# Altium PCB DE-150824.PcbDoc (part 1 of 2)
Units mil, origin at the board's own origin, x right, y up, seen from the top; angles counter-clockwise.
Board outline 2952.76 x 2952.76 mil, 2 copper layers (Top Layer, Bottom Layer); 84 components, 58 nets, 253 pads, 61 vias.
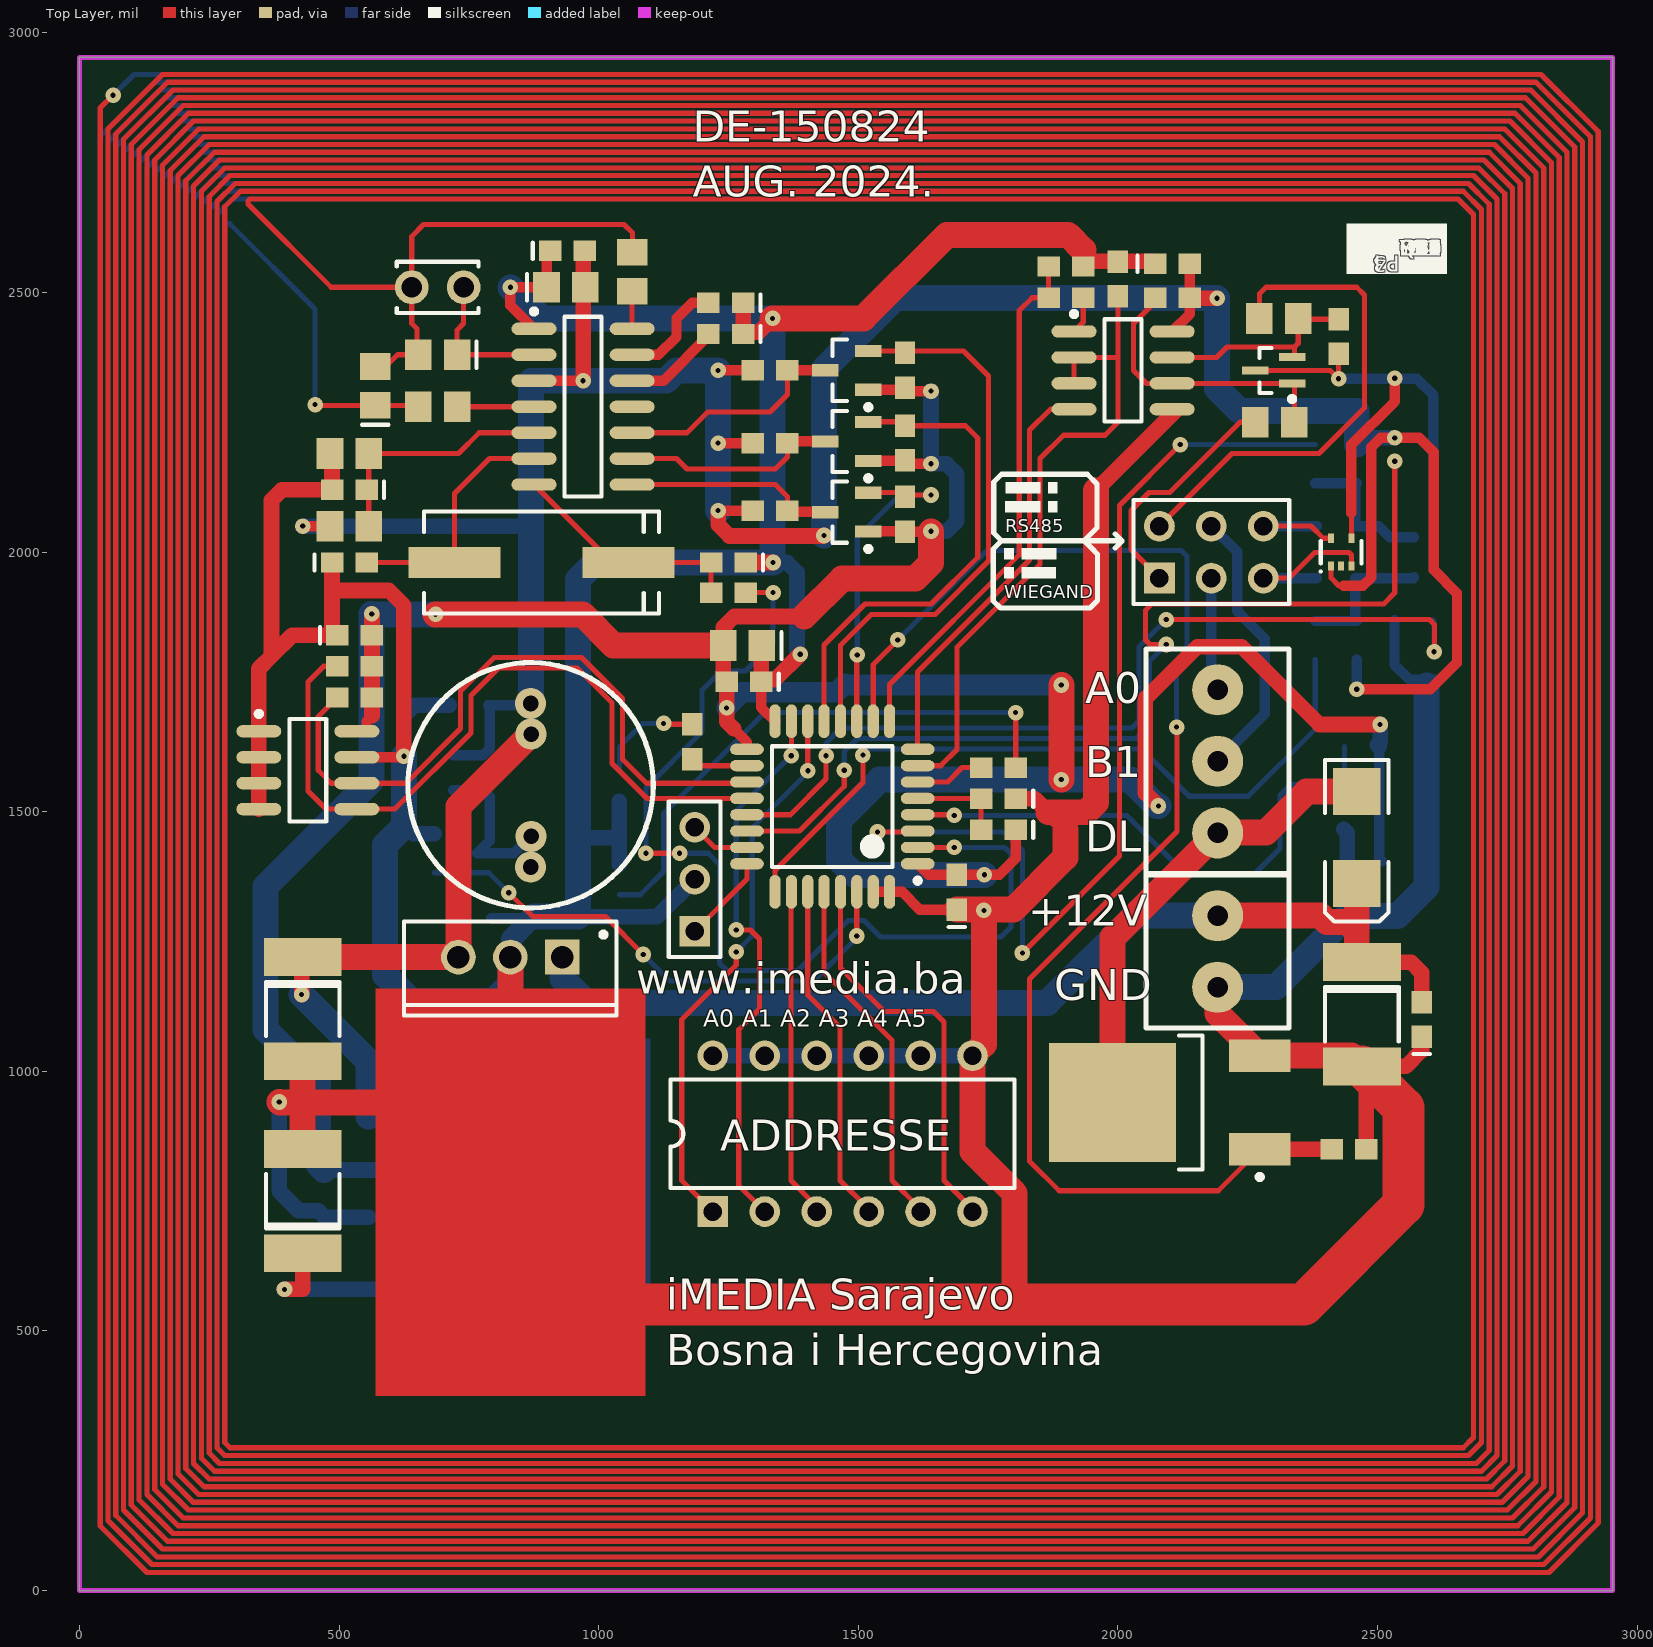
[diagram p0: Top Layer view]
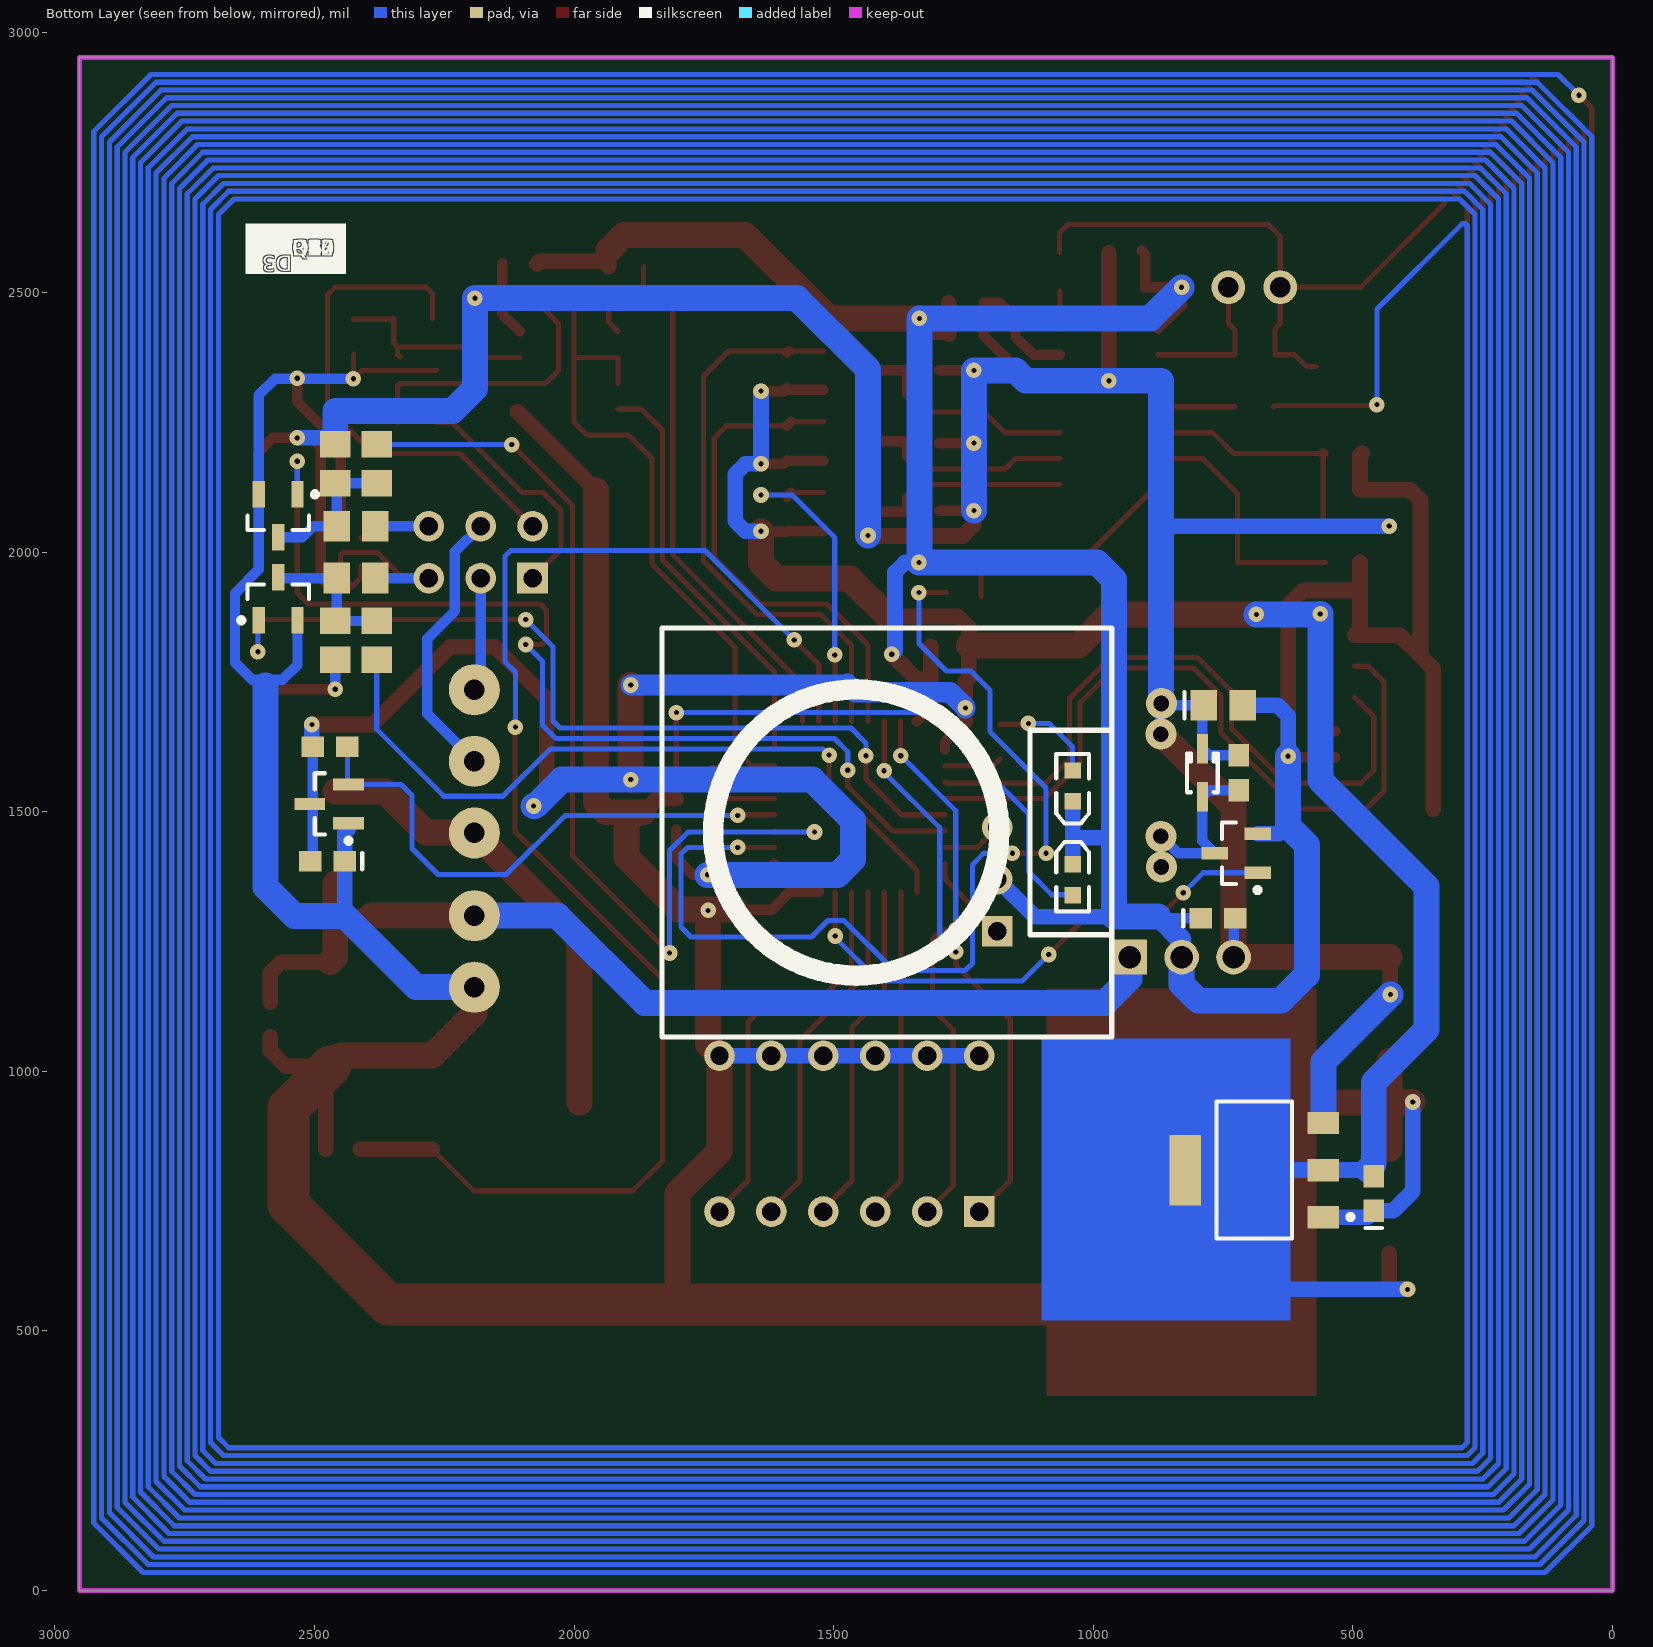
[diagram p1: Bottom Layer view, seen from below]

## Layer stack, top to bottom
Top Solder: solder mask 0.4, Solder Resist, Dk 3.5
Top Layer: signal copper 1.4
Dielectric 1: dielectric 12.6, FR-4, Dk 4.8
Bottom Layer: signal copper 1.4
Bottom Solder: solder mask 0.4, Solder Resist, Dk 3.5

## Board outline
0,0 0,2952.76 2952.76,2952.76 2952.76,0

## Design rules (kind name [scope] priority, off if disabled: settings)
BoardOutlineClearance [All] p1: gap=11.81 ignorepadtopadclearanceinfootprint=FALSE except(15.75: Arc-SplitBarrior Arc-SplitContinuation Track-SplitBarrior Track-SplitContinuation SMDPad-SplitBarrior SMDPad-SplitContinuation THPad-SplitBarrior THPad-SplitContinuation Via-SplitBarrior Via-SplitContinuation Fill-SplitBarrior Fill-SplitContinuation Poly-SplitBarrior Poly-SplitContinuation Region-SplitBarrior Region-SplitContinuation Text-SplitBarrior Text-SplitContinuation)
Clearance "Clearance Different Nets" [All] p1: gap=7.87 ignorepadtopadclearanceinfootprint=FALSE except(3.5: Arc-Arc Arc-Track Arc-SMDPad Track-Track Track-SMDPad; 5: SMDPad-SMDPad SMDPad-Via THPad-Via Via-Via; 10: Arc-Via Arc-Text Track-Via Track-Text SMDPad-Text THPad-Text Via-Text Fill-Text Poly-Text Region-Text Text-Text; 19.68: THPad-THPad Via-Hole)
Clearance "Clearance Same Nets" [All] p2: gap=7.87 ignorepadtopadclearanceinfootprint=FALSE except(3.5: Arc-Arc Arc-Track Arc-SMDPad Track-Track Track-SMDPad SMDPad-SMDPad; 5: SMDPad-Via THPad-Via; 10: Arc-Via Arc-Text Track-Via Track-Text SMDPad-Text THPad-Text Via-Via Via-Text Fill-Text Poly-Text Region-Text Text-Text)
Clearance "Clearance Bottom Layer" [OnLayer('Bottom Layer')] p3: gap=8 ignorepadtopadclearanceinfootprint=TRUE except(10: Arc-Text Track-Text SMDPad-Text THPad-Text Via-Text Fill-Text Poly-Text Region-Text Text-Text)
Clearance "Clearance Top Layer" [OnLayer('Top Layer')] p4: gap=8 ignorepadtopadclearanceinfootprint=TRUE except(10: Arc-Text Track-Text SMDPad-Text THPad-Text Via-Text Fill-Text Poly-Text Region-Text Text-Text)
HoleSize [All] p1: absolutevalues=TRUE maxlimit=248.03 minlimit=7.87 maxpercent=80.000 minpercent=20.000
MinimumAnnularRing [All] p1: minimumring=5.12
MinimumSolderMaskSliver [All] p1: minsoldermaskwidth=3.94
PolygonConnect PolygonConnect_1 [All] p1: thpad.connectstyle=Relief thpad.reliefconductorwidth=20 thpad.reliefentries=4 thpad.polygonreliefangle="90 Angle" thpad.airgapwidth=10 smdpad.connectstyle=Relief smdpad.reliefconductorwidth=20 smdpad.reliefentries=4 smdpad.polygonreliefangle="90 Angle" smdpad.airgapwidth=10 via.connectstyle=Direct via.reliefconductorwidth=20 via.reliefentries=4 via.polygonreliefangle="90 Angle" via.airgapwidth=10
RoutingCorners [All] p1: cornerstyle=Round minsetback=100 maxsetback=100
RoutingVias [All] p1: holewidth=19.68 width=39.37 viastyle="Through Hole" minholewidth=7.87 minwidth=13.78 maxholewidth=39.37 maxwidth=78.74
SilkToSilkClearance [All] p1: silktosilkclearance=3.94
SilkToSolderMaskClearance [IsPad] p1: minsilkscreentomaskgap=3.94 clearancetoexposedcopper=TRUE
SolderMaskExpansion [All] p1: expansion=4 istentingtop=FALSE
Width [All] p1: maxlimit=100 minlimit=3.5 preferedwidth=15
25 further rules are at their usual default settings.

## Components (designator, comment, footprint, x,y, rotation, side; value= is the part's Value field where it differs from the comment)
C1 "C0603" 0603 940,2580 r0 top value=100nF
C2 "C0805" 0805 937,2510 r0 top value=10uF
C3 "1nF" VP31-2.5 690,2510 r0 top value=1pF
C4 "C0805" 0805 690,2380 r180 top value=1nF
C5 "C0603" 0603 1245,2480 r180 top value=100nF
C6 "C0603" 0603 1245,2420 r180 top value=100nF
C7 "C0805" 0805 570,2320 r90 top value=1nF
C8 "20pF" 0603 520,1980 r0 top
C9 "20pF" 0603 1250,1980 r180 top
C10 "C0603" 0603 520,2120 r180 top value=1nF
C11 "C0603" 0603 1690,1345 r90 top value=100nF
C12 "C0603" 0603 530,1840 r0 top value=100nF
C13 "C0805" 0805 750,1705 r180 bottom value=4u7
C14 "C0603" 0603 2105,2555 r0 top value=100nF
C15 "C0805" 0805 1277,1820 r180 top value=4u7
C16 "C0603" 0603 1280,1750 r180 top value=100nF
C17 "C0603" 0603 2475,1405 r0 bottom value=100nF
C18 "C0603" 0603 1770,1525 r180 top value=100nF
C19 "100uF/35V" F 2470,1110 r270 top value=10uF
C20 "100uF/35V" F 430,1120 r270 top value=10uF
C21 "100uF/35V" F 430,750 r90 top value=10uF
C22 "C0603" 0603 2585,1100 r90 top value=100nF
C23 "C0603" 0603 760,1295 r180 bottom value=100nF
C24 "C0603" 0603 460,765 r90 bottom value=100nF
D1 "10BQ100" SMB 2460,1450 r270 top
D2 "1N4148" SOD323 790,1575 r90 bottom
D3 "LED_RED" 1.6X0.8X0.8 1040,1369 r90 bottom
D4 "LED_GREEN" 1.6X0.8X0.8 1040,1550 r270 bottom locked
L1 "BLM15AG121" 0603 1770,1465 r180 top
LS1 "Buzzer 5Vdc" BUZZER 869,1551 r270 top locked
P1 "ULINK ICSP" HDR1X3 1185,1270 r90 top
P2 "Header 3X2" HDR2X3 2080,1950 r0 top
P3 "3 pin terminal" "3 PIN TERMINAL BLOCK  3,5mm" 2192,1597 r180 top locked
P4 "2 pin terminal" "2 PIN TERMINAL BLOCK 3,5mm" 2192,1231 r180 top locked
PS1 "PIEEZP" PKM13EPYH4000-A0 870,1551 r90 top locked
Q1 "AO3400" SOT23_N 2570,1910 r90 bottom
Q2 "BSS123" SOT23_N 1478,2077 r180 top
Q3 "AO3400" SOT23_N 2570,2070 r270 bottom
Q4 "BSS123" SOT23_N 1478,2213 r180 top
Q5 "BSS123" SOT23_N 1478,2350 r180 top
Q6 "BSS123" SOT23_N 725,1420 r0 bottom
R1 "2K2" ERA-0805 2460,1830 r270 bottom
R2 "100R" ERA-0805 2420,1950 r180 bottom
R3 "10K" ERA-0805 2380,1830 r90 bottom
R4 "220K" ERA-0805 1065,2540 r90 top
R5 "2K2" ERA-0603 1590,2073 r270 top
R6 "2K2" ERA-0603 1330,2080 r180 top
R7 "22R" ERA-0805 690,2280 r0 top
R8 "2K2" ERA-0805 2460,2170 r90 bottom
R9 "100R" ERA-0805 2420,2050 r180 bottom
R10 "10K" ERA-0805 2380,2170 r270 bottom
R11 "2K2" ERA-0603 1590,2210 r270 top
R12 "2K2" ERA-0603 1330,2210 r180 top
R13 "NF" ERA-0603 1250,1922 r0 top
R14 "NF" ERA-0805 520,2050 r180 top
R15 "1M" ERA-0805 520,2190 r0 top
R16 "2K2" ERA-0603 1590,2350 r270 top
R17 "2K2" ERA-0603 1330,2350 r180 top
R18 "10K" ERA-0603 2470,1625 r180 bottom
R19 "2K2" ERA-0603 530,1720 r0 top
R20 "2K2" ERA-0603 530,1780 r0 top
R21 "10K" ERA-0603 2445,850 r0 top
R22 "1K" ERA-0603 720,1575 r270 bottom
R23 "10K" ERA-0603 2000,2526 r90 top
R24 "10R" ERA-0805 2302,2250 r0 top
R25 "10R" ERA-0805 2310,2450 r0 top
R26 "1K2" ERA-0603 1900,2490 r180 top
R27 "2K2" ERA-0603 1900,2550 r180 top
R28 "330R" ERA-0603 1770,1585 r0 top
R29 "4K7" ERA-0603 2105,2490 r180 top
R30 "4K7" ERA-0603 2425,2415 r90 top
R31 "330R" ERA-0603 1180,1635 r90 top
S1 "SW DIP-6" DIP-12/SW 1470,880 r0 top
U1 "HTRC110" SOIC-SL14_N 970,2280 r0 top
U2 "TPD2E001-Q1" DRL5_V 2430,2000 r90 top
U3 "STM32F030K6T6" STM-LQFP32_N 1450,1510 r180 top
U4 "24AA64/SN" SOIC-SN8_N 440,1580 r0 top
U5 "IRLR014TRLPBF" ONSC-DPAK-3-369C-01_V 2100,940 r180 top
U6 "TLV803MDBZR" DBZ3_N 2472,1515 r0 bottom
U7 "SN75176BD" D008_N 2010,2350 r0 top
U8 "ESDS552" DCK3_N 2300,2350 r180 top
U9 "L7805CV" TO220 830,1220 r180 top
U10 "REG1117-3.3" ZZ311 690,810 r90 bottom
Y1 "ECS-110-S-5P" CSM-7 890,1980 r180 top value=4MHz

## Footprints (in the part's own frame and the unit in brackets; to place one, negate y for a bottom-side part, rotate by r counter-clockwise, add the part's x,y. Pads: shape width x height; smd on the part's side, far side on the other; paste and mask are expansions set on the pad)
1.6X0.8X0.8 [mm] "SM LED; 2 Flat Leads"
  rect 0.8x0.8 smd: 1(-0.75,0) 2(0.75,0)
  silkscreen extent -1.55,-0.8 1.85,0.8
"2 PIN TERMINAL BLOCK 3,5mm" [mm] "Terminal blok 3,5mm"
  round 2.5 hole 1: 1(0,-1.75) 2(0,1.75)
  silkscreen extent -3.5,-3.75 3.5,3.75, body extent -3.56,-3.81 3.56,3.81, height 9
"3 PIN TERMINAL BLOCK  3,5mm" [mm] "Terminal blok 3,5mm"
  round 2.5 hole 1: 1(0,3.5) 2(0,0) 3(0,-3.5)
  silkscreen extent -3.5,-5.5 3.5,5.5, body extent -3.56,-5.59 3.56,5.59, height 9
0603 [mm] "Chip Capacitor; Body 1.6 x 0.8 mm (LxW typ)"
  rect 1.1x1 smd: 1(-0.85,0) 2(0.85,0)
  silkscreen extent -1.7,-0.4 -1.7,0.4
0805 [mm] "Chip Capacitor; Body 2.0 x 1.2 mm (LxW typ)"
  rect 1.3x1.5 smd: 1(-0.95,0) 2(0.95,0)
  silkscreen extent -1.9,-0.65 -1.9,0.65
BUZZER [mil] "5Vdc PCB buzzer"
  round 60 hole 30: 1(-157.48,0) 2(157.48,0)
  silkscreen extent -236,-236 236,236, body extent -236,-236 236,236, height 378
CSM-7 [mm] "Quartz Crystal, SM; 2 Leads; Body 11.4 x 4.8 x 5 mm (LxWxH)"
  rect 4.5x1.5 smd: 1(-4.25,0) 2(4.25,0)
  silkscreen extent -5.75,-2.5 5.75,2.5
D008_N [mm] "SOIC, 8-Leads, Body 4.9x3.9mm, Pitch 1.27mm, IPC Medium Density"
  oval 2.2x0.6 smd: 1(-2.4,1.905) 2(-2.4,0.635) 3(-2.4,-0.635) 4(-2.4,-1.905) 5(2.4,-1.905) 6(2.4,-0.635) 7(2.4,0.635) 8(2.4,1.905)
  silkscreen extent -2.52,-2.5 0.9,2.88, body extent -1.95,-2.45 1.95,2.45, height 1.75
DBZ3_N [mm] "SOT23, 3-Leads, Body 2.9x1.3mm, Pitch 0.95mm, Lead Span 2.4mm, IPC Medium Density"
  rect 1.5x0.6 smd: 1(-0.95,0.95) 2(-0.95,-0.95) 3(0.95,0)
  silkscreen extent -1.07,-1.5 0.7,1.92, body extent -0.7,-1.52 0.7,1.52, height 1.12
DCK3_N [mm] "SOT23, 3-Leads, Body 2.0x1.25mm, Pitch 0.65mm, Lead Span 2.1mm, IPC Medium Density"
  rect 1.3x0.4 smd: 1(-0.9,0.65) 2(-0.9,-0.65) 3(0.9,0)
  silkscreen extent -1.02,-1.1 0.7,1.52, body extent -0.7,-1.07 0.7,1.08, height 1.1
DIP-12/SW [mm] "DIP Switch; 12 Leads"
  rect 1.5x1.5 hole 0.9: 1(-6.35,-3.81)
  round 1.5 hole 0.9: 2(-3.81,-3.81) 3(-1.27,-3.81) 4(1.27,-3.81) 5(3.81,-3.81) 6(6.35,-3.81) 7(6.35,3.81) 8(3.81,3.81) 9(1.27,3.81) 10(-1.27,3.81) 11(-3.81,3.81) 12(-6.35,3.81)
  silkscreen extent -8.43,-2.65 8.41,2.65
DRL5_V [mm] "SOTFL, 5-Flat Leads, Body 1.2x1.6x0.6mm, Pitch 0.5mm, TI Recommended"
  rect 0.45x0.3 smd: 1(-0.675,0.5) 2(-0.675,0) 3(-0.675,-0.5) 4(0.675,-0.5) 5(0.675,0.5)
  silkscreen extent -1,-1 0.55,1.05, body extent -0.65,-0.85 0.65,0.85, height 0.6
ERA-0603 [mm] "Chip Resistor; Body 1.6 x 0.8 mm (LxW typ)"
  rect 1.1x1 smd: 1(-0.85,0) 2(0.85,0)
ERA-0805 [mm] "Chip Resistor; Body 2 x 1.3 mm (LxW typ)"
  rect 1.3x1.5 smd: 1(-0.95,0) 2(0.95,0)
F [mm] "Chip Capacitor; Body 5.59 x 3.43 mm (LxW typ)"
  rect 1.85x3.8 smd: 1(-2.55,0) 2(2.55,0)
  silkscreen extent -1.33,-1.8 1.33,1.8
HDR1X3 [mm] "Connector; Header; 3 Position"
  rect 1.5x1.5 hole 0.9: 1(0,0)
  round 1.5 hole 0.9: 2(2.54,0) 3(5.08,0)
  silkscreen extent -1.27,-1.27 6.35,1.27
HDR2X3 [mm] "Connector; Header; 3x2 Position"
  rect 1.5x1.5 hole 0.9: 1(0,0)
  round 1.5 hole 0.9: 2(0,2.54) 3(2.54,0) 4(2.54,2.54) 5(5.08,0) 6(5.08,2.54)
  silkscreen extent -1.27,-1.27 6.35,3.81
ONSC-DPAK-3-369C-01_V [mm] "DPAK, 3-Leads, Body 6.54x6.095mm, Pitch 2.29mm"
  rect 3x1.6 smd: 1(-4.4,2.29) 3(-4.4,-2.29)
  rect 6.2x5.8 smd: 4(2.8,0)
  silkscreen extent -4.53,-3.27 -0.45,3.76, body extent -1.6,-3.27 4.49,3.27, height 2.38
PKM13EPYH4000-A0 [mil] "standard taping type piezoelectric sounders"
  round 60 hole 30: 1(-98.43,0) 2(98.43,0)
  body extent -248,-248 248,248, height 272
SMB [mm] "DO-214-AA/SMB; 2 C-Bend Leads; Body 5.3 x 3.6 mm, inc. leads (LxW)"
  rect 2.3x2.3 smd: 1(-2.25,0) 2(2.25,0)
  silkscreen extent -3.8,-1.55 4.1,1.55
SOD323 [mm] "SOD-323/SC-76; 2 Leads; Body 1.7 x 1.3 mm, (LxW)"
  rect 1.45x0.55 smd: 1(1.175,0) 2(-1.175,0)
  silkscreen extent -0.95,-0.75 0.95,0.75
SOIC-SL14_N [mm] "SOIC, 14-Leads, Body 8.7x3.9mm, Pitch 1.27mm, IPC Medium Density"
  oval 2.2x0.6 smd: 1(-2.4,3.81) 2(-2.4,2.54) 3(-2.4,1.27) 4(-2.4,0) 5(-2.4,-1.27) 6(-2.4,-2.54) 7(-2.4,-3.81) 8(2.4,-3.81) 9(2.4,-2.54) 10(2.4,-1.27) 11(2.4,0) 12(2.4,1.27) 13(2.4,2.54) 14(2.4,3.81)
  silkscreen extent -2.52,-4.4 0.9,4.78, body extent -2,-4.38 2,4.38, height 1.75
SOIC-SN8_N [mm] "SOIC, 8-Leads, Body 4.9x3.8mm, Pitch 1.27mm, IPC Medium Density"
  oval 2.2x0.6 smd: 1(-2.4,1.905) 2(-2.4,0.635) 3(-2.4,-0.635) 4(-2.4,-1.905) 5(2.4,-1.905) 6(2.4,-0.635) 7(2.4,0.635) 8(2.4,1.905)
  silkscreen extent -2.52,-2.5 0.9,2.88, body extent -2,-2.5 2,2.5, height 1.75
SOT23_N [mm] "SOT23, 3-Leads, Body 2.9x1.3mm, Pitch 0.95mm, Lead Span 2.3mm, IPC Medium Density"
  rect 1.3x0.6 smd: 1(-1.05,0.95) 2(-1.05,-0.95) 3(1.05,0)
  silkscreen extent -1.17,-1.5 0.7,1.93, body extent -0.7,-1.5 0.7,1.5, height 1.1
STM-LQFP32_N [mm] "QFP, 32-Leads, Body 7x7mm, Pitch 0.8mm, IPC Medium Density"
  oval 1.65x0.55 smd: 1(-4.175,2.8) 2(-4.175,2) 3(-4.175,1.2) 4(-4.175,0.4) 5(-4.175,-0.4) 6(-4.175,-1.2) 7(-4.175,-2) 8(-4.175,-2.8) 17(4.175,-2.8) 18(4.175,-2) 19(4.175,-1.2) 20(4.175,-0.4) 21(4.175,0.4) 22(4.175,1.2) 23(4.175,2) 24(4.175,2.8)
  oval 0.55x1.65 smd: 9(-2.8,-4.175) 10(-2,-4.175) 11(-1.2,-4.175) 12(-0.4,-4.175) 13(0.4,-4.175) 14(1.2,-4.175) 15(2,-4.175) 16(2.8,-4.175) 25(2.8,4.175) 26(2,4.175) 27(1.2,4.175) 28(0.4,4.175) 29(-0.4,4.175) 30(-1.2,4.175) 31(-2,4.175) 32(-2.8,4.175)
  silkscreen extent -4.3,-2.95 2.95,3.75, body extent -3.5,-3.5 3.5,3.5, height 1.6
TO220 [mm] "TO, Thru-Hole, Vertical, Heatsink Mounted; 3 In-Line Leads; Pitch 2.54 mm"
  rect 1.7x1.7 hole 1.1: 1(-2.54,0)
  round 1.7 hole 1.1: 2(0,0) 3(2.54,0)
  silkscreen extent -5.2,-1.75 5.2,2.85, body extent -5.25,-1.8 5.25,2.9, height 19.7
VP31-2.5 [mm] "Capacitor, Ceramic, Thru-Hole, Dipped Radial; Body 4 x 2.5 mm (WxT) Pin Spacing 2.54 mm (typ)"
  round 1.65 hole 1: 1(-1.27,0) 2(1.27,0)
  silkscreen extent -2,-1.25 2,1.25
ZZ311 [mm] "SOT-223/SC-73; 4 Leads; Body 6.7 x 7.3 mm, inc. leads (LxW max)"
  rect 1.1x1.55 smd: 1(-2.3,-3.375) 2(0,-3.375) 3(2.3,-3.375)
  rect 3.45x1.55 smd: 4(0,3.375)
  silkscreen extent -3.35,-4.82 3.35,1.85

## Part data
C1 C2 C4 C5 C6 C7 C10 C11 C12 C13 C14 C15 C16 C17 C18 C22 C23 C24: "Ceramic Chip Capacitor - Standard", PackageDocument=Mar-2001, ComponentLink1Description="Manufacturer Link", ComponentLink1URL=http://www.kemet.com/, ComponentLink2Description=Datasheet, ComponentLink2URL=http://www.kemet.com/kemet/web/homepage/kechome.nsf/vapubfilesname/F3102TA.pdf/$file/F3102TA.pdf, DatasheetDocument=Mar-2001, LatestRevisionDate=19-Mar-2004, LatestRevisionNote="Silkscreen size reduced.", Note="Footprint corresponds to dimensions for bulk cassette packaging. This case size has tightened tolerances.", Published=17-Jul-2002, Publisher="Altium Limited"
  C1 C5 C6 C10 C11 C12 C14 C16 C17 C18 C22 C23 C24: Code_IPC="1608 [0603]", Code_JEITA=0603, PackageReference=0603
  C2 C4 C7 C13 C15: Code_IPC=2012[0805], Code_JEITA=0805, PackageReference=0805
C3: library part VP31BA1R0CA, "Dipped Radial Multilayer Ceramic Capacitor COG (NPO): 1pF, 50/63V", PackageDocument=8-Feb-2002, ComponentLink1Description="Manufacturer Link", ComponentLink1URL=http://www.vishay.com/, DatasheetDocument=2-Jan-2002, Note="See Datasheet for other packages & tolerances", PackageReference=VP31-2.5, Published=17-Dec-2003, Publisher="Altium Limited"
C8 C9: library part C0603, "Ceramic Chip Capacitor - Standard", PackageDocument=Mar-2001, Code_IPC="1608 [0603]", Code_JEITA=0603, ComponentLink1Description="Manufacturer Link", ComponentLink1URL=http://www.kemet.com/, ComponentLink2Description=Datasheet, ComponentLink2URL=http://www.kemet.com/kemet/web/homepage/kechome.nsf/vapubfilesname/F3102TA.pdf/$file/F3102TA.pdf, DatasheetDocument=Mar-2001, LatestRevisionDate=19-Mar-2004, LatestRevisionNote="Silkscreen size reduced.", Note="Footprint corresponds to dimensions for bulk cassette packaging. This case size has tightened tolerances.", PackageReference=0603, Published=17-Jul-2002, Publisher="Altium Limited"
C19 C20 C21: library part 194D106X0015F2, "Midget Conformal Coated Solid Tantalum Chip Capacitor: 10uF, 20% Tolerance, 15 WVDC @ +85°C, Surge = 20V", ComponentLink1Description="Manufacturer Link", ComponentLink1URL=http://www.vishay.com/, ComponentLink2Description=Datasheet, ComponentLink2URL=http://www.vishay.com/docs/40000/194d.pdf, DatasheetDocument=05-Jul-2002, Note="See Data Sheet for full range of components", PackageReference=F, Published=19-Mar-2004, Publisher="Altium Limited"
D1: "Schottky Rectifier", ComponentLink1Description="Manufacturer Link", ComponentLink1URL=http://www.irf.com/, ComponentLink2Description=Datasheet, ComponentLink2URL=http://www.irf.com/product-info/datasheets/data/10bq100.pdf, DatasheetVersion=PD-2.437A, LatestRevisionDate=17-Jul-2002, LatestRevisionNote="Re-released for DXP Platform.", PackageDescription="DO-214-AA/SMB; 2 C-Bend Leads; Body 5.3 x 3.6 mm, inc. leads (LxW)", PackageReference=SMB, Published=8-Jun-2000, Publisher="Altium Limited"
D2: library part BAS321, "General-purpose Diode", ComponentLink1Description="Manufacturer Link", ComponentLink1URL=http://www.semiconductors.philips.com/, ComponentLink2Description=Datasheet, ComponentLink2URL=http://www.semiconductors.philips.com/acrobat/datasheets/BAS321_2.pdf, DatasheetVersion=9-Feb-1999, LatestRevisionDate=19-Mar-2004, LatestRevisionNote="Silkscreen size reduced.", PackageDescription="SOD-323/SC-76; 2 Leads; Body 1.7 x 1.3 mm, (LxW)", PackageReference=SOD323, PackageVersion=May-1999, Published=17-Sep-2003, Publisher="Altium Limited"
D3 D4: library part HSMB-C190, "Blue Surface Mount Chip LED, Blue", LED_Colour=Blue, ComponentLink1Description="Manufacturer Link", ComponentLink1URL=http://www.avagotech.com/, ComponentLink2Description=Datasheet, ComponentLink2URL=http://cp.literature.agilent.com/litweb/pdf/5988-5211EN.pdf, DatasheetVersion=26-Feb-2002, LuminousIntensity="1.6mcd (Minimum).", PackageDescription="SM LED; 2 Flat Leads", PackageReference=1.6X0.8X0.8, PackageVersion=Mar-2002, PCB_Layout="Complies with manufacturer's recommendation.", Published=11-Dec-2002, Publisher="Altium Limited"
L1: library part "Chip inductor", "SMD chip inductor", Code_IEC=1005, Code_JEITA=0402, LatestRevisionDate=29-May-2009, LatestRevisionNote="IPC-7351 Footprint Added.", PackageDescription="Chip Inductor", PackageReference=0402-A, Published=8-Jun-2000, Publisher="Altium Limited"
LS1: library part BUZZER, "5Vdc PCB buzzer"
P1: library part "Header 3", "Header, 3-Pin", LatestRevisionDate=17-Jul-2002, LatestRevisionNote="Re-released for DXP Platform.", Publisher="Altium Limited"
P2: "Header, 3-Pin, Dual row", LatestRevisionDate=17-Jul-2002, LatestRevisionNote="Re-released for DXP Platform.", Publisher="Altium Limited"
P3: library part "TERMINAL BLOK 3", "3 pinski terminal blok konektor"
P4: library part "TERMINAL BLOK 2", "Terminal blok konektor 3,5 mm"
PS1: library part PKM13EPYH4000-A0, "Surface Mount Quartz Crystal", PackageDocument=18-Oct-1999, ComponentLink1Description="Manufacturer Link", ComponentLink1URL=http://www.cmac.com/mt/, ComponentLink2Description=Datasheet, ComponentLink2URL=http://www.cmac.com/mt/databook/crystals/smd/hc49_4h_smx.pdf, DatasheetDocument=18-Oct-1999, Note="PCB layout complies with manufacturer's recommendation.", PackageReference=HC49/4H_SMX, Published=17-Jul-2002, Publisher="Altium Limited"
Q1 Q3: library part BSS123, "N-channel Enhancement Mode Vertical D-MOSFET", ComponentLink1Description="Manufacturer Link", ComponentLink1URL=http://www.semiconductors.philips.com/, ComponentLink2Description=Datasheet, ComponentLink2URL=http://www.semiconductors.philips.com/acrobat/datasheets/BSS123_3.pdf, DatasheetVersion=Apr-1995, LatestRevisionDate=12-Dec-2006, LatestRevisionNote="IPC-7351 Footprint Added.", PackageDescription="3-Pin SOT-23 Package 0.95 mm Pitch, 2.3 mm Lead Span", PackageReference=SOT23, PackageVersion=May-1999, Published=17-Sep-2003, Publisher="Altium Limited"
Q2 Q4 Q5 Q6: "N-channel Enhancement Mode Vertical D-MOSFET", ComponentLink1Description="Manufacturer Link", ComponentLink1URL=http://www.semiconductors.philips.com/, ComponentLink2Description=Datasheet, ComponentLink2URL=http://www.semiconductors.philips.com/acrobat/datasheets/BSS123_3.pdf, DatasheetVersion=Apr-1995, LatestRevisionDate=12-Dec-2006, LatestRevisionNote="IPC-7351 Footprint Added.", PackageDescription="3-Pin SOT-23 Package 0.95 mm Pitch, 2.3 mm Lead Span", PackageReference=SOT23, PackageVersion=May-1999, Published=17-Sep-2003, Publisher="Altium Limited"
R1 R2 R3 R4 R7 R8 R9 R10 R13 R14 R15 R24 R25: library part ERAS, "Metal Film Thermosensitive Chip Resistor, 0.56 Ohm to 10k Ohm Range, 5% Tolerance, 0805 Size, 0.1 W", PackageDocument=Mar-2003, Code_IPC="2012 [0805]", ComponentLink1Description="Manufacturer Link", ComponentLink1URL=http://www.panasonic.com/industrial/components/resistive_products.htm, ComponentLink2Description=Datasheet, ComponentLink2URL=http://www.panasonic.com/industrial/components/pdf/AOF0000CE1.pdf, LatestRevisionDate=19-Mar-2004, LatestRevisionNote="Silkscreen size reduced.", Note="If flow soldering, adjust pad width of PCB Footprint to 0.7 - 0.8 times the width of the resistor.", PackageReference=ERA-0805, Published=17-Dec-2003, Publisher="Altium Limited"
R5 R6 R11 R12 R16 R17 R18 R19 R20 R21 R22 R23 R26 R27 R28 R29 R30 R31: library part ERAV, "Metal Film Thermosensitive Chip Resistor, 0.56 Ohm to 10k Ohm Range, 5% Tolerance, 0603 Size, 0.063 W", PackageDocument=Mar-2003, Code_IPC="1608 [0603]", ComponentLink1Description="Manufacturer Link", ComponentLink1URL=http://www.panasonic.com/industrial/components/resistive_products.htm, ComponentLink2Description=Datasheet, ComponentLink2URL=http://www.panasonic.com/industrial/components/pdf/AOF0000CE1.pdf, LatestRevisionDate=19-Mar-2004, LatestRevisionNote="Silkscreen size reduced.", Note="If flow soldering, adjust pad width of PCB Footprint to 0.7 - 0.8 times the width of the resistor.", PackageReference=ERA-0603, Published=17-Dec-2003, Publisher="Altium Limited"
S1: "DIP Switch, 6 Position, SPST", LatestRevisionDate=17-Jul-2002, LatestRevisionNote="Re-released for DXP Platform.", PackageDescription="DIP Switch; 12 Leads", PackageReference=DIP-12/SW, Published=24-Mar-1999, Publisher="Altium Limited"
U1: "HITAG reader chip"
U2: library part TPD2E001IDRLRQ1, "Automotive Catalog Low-Capacitance + / - 15 kV ESD-Protection Array for High-Speed Data Inter, 2 Channels, -40 to +85 degC, 5-pin SOT (DRL), Green (RoHS & no Sb/Br)", Breakdown Voltage(Min)(V)=11, IO Capacitance(Typ)(pF)=1.5, IO Leakage Current(nA)=1, Manufacturer="Texas Instruments", Supplier Part Number 1=296-29985-2-ND, ComponentLink1Description=Datasheet, ComponentLink1URL=http://www.ti.com/general/docs/lit/getliterature.tsp?genericPartNumber=TPD2E001-Q1&fileType=pdf, ComponentLink2Description="URL Link1", ComponentLink2URL=SamplesURL:http://www.ti.com/product/tpd2e001-q1#samples, DatasheetVersion=SLLS993, Eco-Plan="Green (RoHS & no Sb/Br)", IEC 61000-4-2 Air-Gap(+/- kV)=15, IEC 61000-4-2 Contact(+/- kV)=8, Mounting Technology="Surface Mount", PackageDescription="5-Pin Plastic Small Outline, Flat Lead 0.5 mm Pitch", PackageReference=DRL5, PackageVersion="revD, Aug-2007", PartNumber=TPD2E001IDRLRQ1, SubFamily="ESD Solution", Supplier 1=Digi-Key, Supplier 2=Digi-Key, Supplier 3=Digi-Key, Supplier 4=Newark, Supplier 5=Mouser, Supplier Part Number 2=296-29985-1-ND, Supplier Part Number 3=296-29985-6-ND, Supplier Part Number 4=55R7553, Supplier Part Number 5=595-TPD2E001IDRLRQ1, USB High Speed=TRUE
U3: "ARM Cortex-M0 32-bit MCU, 32 KB Flash, 4 KB Internal RAM, 26 I/Os, 32-pin LQFP, -40 to 85 degC, Tray", I/Os (High Current)=26, Operating Frequency(F) (Processor speed) (MHz)=48, Supplier Part Number 1=497-14046-ND, Supply Voltage(Vcc) min (V)=2.4, ComponentLink1Description="Manufacturer URL", ComponentLink1URL=http://www.st.com/web/en/home.html, ComponentLink2Description=Datasheet, ComponentLink2URL=http://www.st.com/st-web-ui/static/active/en/resource/technical/document/datasheet/DM00088500.pdf, ComponentLink3Description="Package Specification", ComponentLink3URL=http://www.st.com/st-web-ui/static/active/en/resource/technical/document/datasheet/DM00088500.pdf, Core="ARM Cortex-M0", DatasheetVersion="Rev. 1", FLASH Size (Prog) (kB)=32, Internal RAM Size (kB)=4, Mounting Technology="Surface Mount", PackageDescription="32-Pin Low Profile Quad Flat Package, 7 x 7 mm Body, 0.8 mm Pitch", PackageReference=LQFP32, PackageVersion="Rev. 1, 07/2013", Packing=Tray, PartNumber=STM32F030K6T6, Supplier 1=Digi-Key, Supplier 2=Newark, Supplier 3=Mouser, Supplier Part Number 2=19X6194, Supplier Part Number 3=511-STM32F030K6T6
U4: "64Kbit, 400kHz, 1.7V, I2C Serial EEPROM, 8-Pin SOIC 150mil, Commercial Temperature", Supplier Part Number 1=24AA64/SN-ND, Code_IPC=SOIC127P600-8, Code_JEDEC=MS-012, ComponentLink1Description=Datasheet, ComponentLink1URL=http://ww1.microchip.com/downloads/en/DeviceDoc/21189Q.pdf, ComponentLink2Description="Packaging Specification", ComponentLink2URL=http://www.microchip.com/stellent/groups/techpub_sg/documents/packagingspec/en012702.pdf, ComponentLink3Description="Microchip.com Home", ComponentLink3URL=http://www.microchip.com/, DatasheetVersion="revQ, Jun-2009", PackageDescription="8-Lead Plastic Small Outline (SN) - Narrow, 3.90mm Body [SOIC]", PackageReference=SOIC-SN8, PackageVersion="revBB, Aug-2009", Published=29-Jan-2009, Publisher="Altium Limited", Supplier 1=Digi-Key
U5: library part NCV8408DTRKG, "Self-Protected Low Side Driver with Temperature and Current Limit, 42 V, 10 A, Single N-Channel, 3-Pin DPAK, Pb-Free, Tape and Reel", Manufacturer="On Semiconductor", Supplier Part Number 1=60W1739, Channel Polarity="N Channel", ComponentLink1Description="Manufacturer URL", ComponentLink1URL=http://www.onsemi.com/, ComponentLink2Description=Datasheet, ComponentLink2URL=http://www.onsemi.com/pub_link/Collateral/NCV8408-D.PDF, ComponentLink3Description="Package Specification", ComponentLink3URL=http://www.onsemi.cn/pub_link/Collateral/369C.PDF, DatasheetVersion="Rev. 2", Mounting Technology="Surface Mount", PackageDescription="3-Pin Flange Mount, Body 6.54 x 6.095 mm, Pitch 2.29 mm", PackageReference=DPAK-3-369C-01, PackageVersion="Rev. E, 02/2014", Packing="Tape and Reel", PartNumber=NCV8408DTRKG, RoHS=Pb-Free, Supplier 1=Newark, Supplier 2=Mouser, Supplier Part Number 2=863-NCV8408DTRKG
U6: "Voltage Supervisor with Active-Low, Open Drain Reset, 1 Supply Monitored, -40 to 125 degC, 3-pin SOT-23 (DBZ), Green (RoHS & no Sb/Br)", Manufacturer="Texas Instruments", Rating=Catalog, Supplier Part Number 1=296-29194-2-ND, Threshold Voltage 1 (typ)(Typ)(V)=4.38, # of supplies monitored=1, Code_JEDEC=TO-236-AB, ComponentLink1Description=Datasheet, ComponentLink1URL=http://www.ti.com/general/docs/lit/getliterature.tsp?genericPartNumber=TLV803M&fileType=pdf, DatasheetVersion=SBVS157B, Iq(Typ)(uA)=9, Mounting Technology="Surface Mount", Output Driver Type / Reset Output="Active-low, Open-drain", PackageDescription="3-Pin Plastic Small-Outline Package, 0.95 mm Pitch, 2.4 mm Lead Span", PackageReference=DBZ3, PackageVersion="revB, Apr-2005", PartNumber=TLV803MDBZR, Reset Threshold Accuracy(%)=2, SubFamily="Supervisor and Reset IC", Supplier 1=Digi-Key, Supplier 2=Digi-Key, Supplier 3=Digi-Key, Supplier 4=Newark, Supplier 5=Mouser, Supplier Part Number 2=296-29194-1-ND, Supplier Part Number 3=296-29194-6-ND, Supplier Part Number 4=58T0286, Supplier Part Number 5=595-TLV803MDBZR, Time Delay(ms)=200, VCC(Max)(V)=6, VCC(Min)(V)=1.1
U7: "Differential Bus Transceiver", Code_IPC=SOIC127P600-8, ComponentLink1Description="Manufacturer Link", ComponentLink1URL=http://www.ti.com/, ComponentLink2Description=Datasheet, ComponentLink2URL=http://www-s.ti.com/sc/ds/sn75176b.pdf, DatasheetVersion=Sep-1989, LatestRevisionDate=13-Apr-2006, LatestRevisionNote="IPC-7351 Footprint Added.", Note="Receiver Hysteresis of 50mV Typical", PackageDescription="8-Pin Small Outline Integrated Circuit 1.27 mm Pitch", PackageReference=D008, PackageVersion=Jan-1998, Published=15-May-2002, Publisher="Altium Limited"
U8: library part TPD2E007DCKR, "ESD Protection Array for AC Signal Data Interface, 2 Channels, -40 to +85 degC, 3-pin SC70 (DCK), Green (RoHS & no Sb/Br)", Breakdown Voltage(Min)(V)=+/-14, IO Capacitance(Typ)(pF)=15, IO Leakage Current(nA)=50, Manufacturer="Texas Instruments", Supplier Part Number 1=296-25281-2-ND, ComponentLink1Description=Datasheet, ComponentLink1URL=http://www.ti.com/general/docs/lit/getliterature.tsp?genericPartNumber=TPD2E007&fileType=pdf, ComponentLink2Description="URL Link1", ComponentLink2URL=SamplesURL:http://www.ti.com/product/tpd2e007#samples, DatasheetVersion=SLVS796E, Eco-Plan="Green (RoHS & no Sb/Br)", IEC 61000-4-2 Air-Gap(+/- kV)=15, IEC 61000-4-2 Contact(+/- kV)=8, Mounting Technology="Surface Mount", PackageDescription="3-Pin Plastic Small-Outline Package, 0.65 mm Pitch, 2.1 mm Lead Span", PackageReference=DCK3, PackageVersion="revG, Jan-2007", PartNumber=TPD2E007DCKR, SubFamily="ESD Solution", Supplier 1=Digi-Key, Supplier 2=Digi-Key, Supplier 3=Digi-Key, Supplier 4=Farnell, Supplier 5=Newark, Supplier 6=Newark, Supplier 7=Mouser, Supplier Part Number 2=296-25281-1-ND, Supplier Part Number 3=296-25281-6-ND, Supplier Part Number 4=2120465, Supplier Part Number 5=94T5089, Supplier Part Number 6=55R7554, Supplier Part Number 7=595-TPD2E007DCKR
U9: "Positive Voltage Regulator, 5V, 3-Pin TO-220", ComponentLink1Description="Manufacturer URL", ComponentLink1URL=http://www.st.com, ComponentLink2Description=Datasheet, ComponentLink2URL=http://www.st.com/internet/com/TECHNICAL_RESOURCES/TECHNICAL_LITERATURE/DATASHEET/CD00000444.pdf, ComponentLink3Description="Package Specification", ComponentLink3URL=http://www.st.com/internet/com/TECHNICAL_RESOURCES/TECHNICAL_LITERATURE/PACKAGE_INFORMATION/CD00004649.pdf, DatasheetVersion=Nov-2011, PackageDescription="TO, Thru-Hole, Vertical, Heatsink Mounted; 3 In-Line Leads; Pitch 2.54 mm", PackageReference=TO220, PackageVersion=ver3.0, PartNumber=L7805CV
U10: "800mA and 1A Low Dropout Positive Regulator 2.85V, 3.3V, 5V, and Adjustable", ComponentLink1Description="Manufacturer Link", ComponentLink1URL=http://www.ti.com/, ComponentLink2Description=Datasheet, ComponentLink2URL=http://www-s.ti.com/sc/ds/REG1117.pdf, DatasheetVersion=Sep-1997, LatestRevisionDate=17-Jul-2002, LatestRevisionNote="Re-released for DXP Platform.", PackageDescription="SOT-223/SC-73; 4 Leads; Body 6.7 x 7.3 mm, inc. leads (LxW max)", PackageReference=ZZ311, PackageVersion=revC, Published=8-Jun-2000, Publisher="Altium Limited"
Y1: "Crystal Oscillator", ComponentLink1Description="Manufacturer Link", ComponentLink1URL=http://www.ecsxtal.com/, ComponentLink2Description=Datasheet, ComponentLink2URL=http://www.ecsxtal.com/pdf3/CSM_7.pdf, DatasheetDocument=18-Apr-2000, PackageReference=CSM-7, Published=17-Jul-2002, Publisher="Altium Limited"

## Via types
v1: diameter 30, hole 10, Top Layer to Bottom Layer, 61 vias

## Nets (pads, with @x,y where several pads share a name; then routed paths per layer and width w, separated by ;. In a path a pad name is that pad's centre, name@x,y a point inside that pad or via, vN(x,y) a via of type N, cw(c..) or ccw(c..) an arc to the next point about the centre after c; other vN are vias at no path point)
3V3: C11.2 C12.2 C15.2 C16.2 C17.2 C21.1 C24.2 L1.1 Q2.1 Q4.1 Q5.1 R5.2 R11.2 R16.2 R18.1 R19.2 R20.2 U3.1 U3.17 U4.8 U6.3 U10.2 U10.4 | length 7444.4
  Top Layer w20: U4.8 551.24,1655 552.92,1656.67 552.92,1673.43 563.46,1683.98 563.46,1685.31 ; 1260,1660 1285.63,1634.37 U3.17 ; Q2.1@1520,2040 R5.2@1590,2040 ; Q4.1@1520,2176.3 1589.76,2176.3 R11.2 1596.54,2170 v1(1640,2170) ; Q5.1@1520,2312.6 1586.06,2312.6 R16.2 1596.54,2310 v1(1640,2310) ; R5.2 v1@1639.54,2039.54 ; U3.1 1635.67,1378.46 C11.2 v1(1743,1378.46) 1771.46,1378.46 1803.46,1410.46 L1.1 ; 2057.1,1528.9 2075,1511 v1(2078,1511)
  Top Layer w30: v1(395,580) 430,580 C21.1 ; v1(563,1881) 563.46,1880.54 C12.2 R20.2 563.46,1685.31 ; 1260,1660 1246.54,1673.46 v1(1246.54,1700) C16.2 1240,1756.54 1240,1820 1240,1855 1261,1876 1396,1876 ; v1(2078,1511) 2053,1536 2053,1718 2153,1818 2238,1818 2388,1668 v1(2505,1668)
  Top Layer w50: v1(686,1880) 969,1880 1029,1820 C15.2@1240,1820 ; 1396,1876 1469,1949 1610,1949 1640,1979 v1(1640,2040) ; v1(1891,1562) v1(1891,1744)
  Bottom Layer w20: R18.1 2503.46,1410 C17.2
  Bottom Layer w30: v1(395,580) 650,580 ; C24.2@471.54,810 U10.2 705,810 ; v1(563,1881) v1@564,1880 ; v1(1640,2040) 1670,2040 1690,2060 1690,2150 1670,2170 v1(1640,2170) v1(1640,2310) ; R18.1 2500,1628.46 2505,1633.46 v1(2505,1668)
  Bottom Layer w40: v1(1246.54,1700) 1246.54,1700.54 1276,1730 1458,1730 1474,1746 1476,1744 v1(1891,1744)
  Bottom Layer w50: C24.2@471.54,810 460,821.54 460,979 358,1081 358,1356 563,1561 v1(563,1881) ; v1@564,1880 v1(686,1880) ; v1(1743,1378.46) 1492.54,1378.46 1463,1408 1463,1484 1541,1562 v1(1891,1562) 2024,1562 2075,1511 v1(2078,1511)
5V: C1.2 C2.2 C13.1 C14.2 C20.1 C23.2 D2.1 LS1.1 PS1.2 R1.2 R6.2 R8.2 R12.2 R14.2 R17.2 R22.1 R29.1 U1.3 U2.1 U7.8 U9.3 U10.3 | length 7200.3
  Top Layer w10: U2.1 2410.31,1950.69 2426,1935 2435,1935
  Top Layer w20: v1(430,2050) R14.2 ; U1.3 v1(970,2330) ; C1.2@970,2576.54 C1.2 ; v1(1230,2080) R6.2 ; v1(1230,2210) R12.2 ; v1(1230,2350) R17.2 ; U7.8 2105,2425 2138.46,2458.46 R29.1 C14.2 ; 2435,1935 2472,1935 2488,1951 2488,2202 2506,2220 v1(2533,2220) 2580,2220 2608,2192 2608,1966 2653,1921 2653,1787 2602,1736 v1(2460,1736)
  Top Layer w30: v1(428,1148) 428,1218.39 C20.1 ; v1(970,2330) C1.2@970,2576.54 ; v1(1230,2080) 1230,2053 1252,2031 1433,2031 v1(1434,2032) ; R29.1 2139.46,2489 v1(2191,2489)
  Top Layer w50: C20.1 430.39,1220 U9.3 730,1510 PS1.2@870,1650
  Bottom Layer w20: R22.1 777.2,1608.46 D2.1 790,1702.4 C13.1 865.94,1705 870,1709.06 PS1.2@870,1650 ; C23.2 730,1291.54 U9.3 ; v1(2460,1736) R1.2
  Bottom Layer w30: v1(430,2050) 870,2050 ; R8.2 2472.6,2220 v1(2533,2220)
  Bottom Layer w50: v1(428,1148) 557.13,1018.87 U10.3@557.13,913 ; LS1.1@870,1709.06 870,2050 870,2330 v1(970,2330) 1130,2330 1150,2350 v1(1230,2350) v1(1230,2210) v1(1230,2080) ; v1(1434,2032) 1434,2352 1571,2489 v1(2191,2489) 2191,2315 2234,2272 2460,2272 R8.2
A_D0: P2.3 P3.3 | length 219.5
  Bottom Layer w20: P2.3 2180,1747.8 P3.3@2192.2,1735.59
B_D1: P2.4 P3.2 | length 532.5
  Bottom Layer w20: P2.4 2229.53,2000.47 2229.53,1886.47 2283,1833 2283,1688.59 P3.2@2192.2,1597.8
BUZZER: Q6.1 U3.30 | length 1022.9
  Top Layer w10: v1(827,1344) 873,1298 1013,1298 v1(1086,1225) ; v1(1497.24,1260.76) U3.30
  Bottom Layer w10: Q6.1 788.4,1382.6 v1(827,1344) ; v1(1086,1225) 1137,1174 1414,1174 1497.24,1257.24 v1(1497.24,1260.76)
DC_IN: C19.1 C22.2 D1.2 P4.1 U9.1 | length 2007.6
  Top Layer w30: C19.1 2564.61,1210.39 2585,1190 C22.2
  Top Layer w50: P4.1@2192.2,1300 2390.56,1300 2402.92,1287.64 2442.36,1287.64 2460,1270 ; D1.2 2460,1270 ; C19.1 2460,1220.39 2460,1270
  Bottom Layer w50: U9.1 930,1179 977,1132 1864,1132 2032,1300 P4.1@2192.2,1300
DOORLOCK: R21.1 U3.10 U5.1 | length 2736.2
  Top Layer w10: U3.10 1528.74,1783.74 v1(1576,1831) ; v1@2114,1661 2114,1462 1830,1178 1830,827 1887,770 2193.39,770 U5.1
  Top Layer w30: U5.1 2273.39,850 R21.1
  Bottom Layer w10: v1(1576,1831) 1748,2003 2122,2003 2133,1992 2133,1789 2113,1769 v1(2113,1663)
GND: C1.1 C2.1 C5.1 C6.1 C8.1 C9.1 C10.2 C11.1 C12.1 C13.2 C14.1 C15.1 C16.1 C17.1 C18.1 C19.2 C20.2 C21.2 C22.1 C23.1 C24.1 D3.2 D4.2 P1.2 P4.2 Q1.2 Q3.2 Q6.2 R15.1 R21.2 R23.2 R27.1 R30.1 S1.7 S1.8 S1.9 S1.10 S1.11 S1.12 U1.1 U2.4 U3.16 U3.31 U3.32 U4.1 U4.2 U4.3 U4.4 U4.7 U5.3 U6.1 U7.5 U8.3 U9.2 U10.1 | length 16061.7
  Top Layer w10: U8.3 2409,2350 v1(2425,2334) ; v1@2425,2335 R30.1 ; U2.4 2449.68,2075.68
  Top Layer w20: U4.7 623,1605 v1(625,1607) ; U1.1 830,2475.51 v1(830,2510) C2.1 900,2510 900,2573.46 C1.1 ; C16.1 1313.46,1700.67 U3.16 ; U3.31 U3.32 1584.37,1345.63 1618.46,1311.54 C11.1 ; 2449.68,2075.68 2449.68,2206.68 2533,2290 v1(2533,2335)
  Top Layer w30: U4.4 U4.3 U4.2 U4.1 345.51,1775.51 370,1800 ; R15.1 486.54,2186.06 C10.2 390,2120 370,2100 370,1800 ; C8.1 486.54,1926 ; v1(625,1607) 625,1897 596,1926 486.54,1926 ; C5.1 C6.1 1282.2,2423.73 1308.73,2423.73 v1(1335,2450) ; C9.1 v1(1336,1980) ; C15.1@1313.46,1819.06 C16.1 1318.15,1754.69 1339.69,1754.69 v1(1388.28,1803.28) ; C18.1 1840,1525 1866,1499 1899,1466 ; 1933.46,2581.54 R27.1 1943.46,2560 2066.54,2560 C14.1 ; 1958,2119 U7.5@2109.24,2270.24 ; C19.2 2554.61,1009.61 2585,1040 C22.1 ; R21.2 C19.2@2478.46,1001.14 ; 370,1800 410,1840 C12.1 486.54,1850 486.54,1926
  Top Layer w50: v1(385,941) 386,940 430,940 ; C21.2 430,940 ; C20.2 430,940 ; 615,940 430,940 ; 830,1100 U9.2 ; 931,557 937,551 ; v1(1335,2450) 1510,2450 1671,2611 1904,2611 1933.46,2581.54 ; C11.1 1798.54,1311.54 1899,1412 1899,1466 ; v1(1742,1310) 1742,1052 S1.7 1720,846 1801,765 1801,551 ; 1866,1499 1939,1499 1958,1518 1958,2119 ; P4.2@2192.2,1162.2 2192.2,1111.18 U5.3 2449.45,1030.16 C19.2
  Top Layer w80: 937,551 1801,551 2358,551 2550,743 2550,929.61 2478.46,1001.14 C19.2
  Bottom Layer w20: C23.1 872,1295 875,1298 ; v1(2425,2334) 2576,2334 2607.4,2302.6 Q3.2 2607.4,1966.6 2653,1921 2653,1787 2620,1754 2562,1754 2532.6,1783.4 Q1.2
  Bottom Layer w30: v1(385,941) 385,769 422.46,731.54 C24.1 472.09,719.45 U10.1 ; 625,1475 642.6,1457.4 Q6.2 ; v1(625,1607) 625,1685 645,1705 C13.2 ; 960,1298 1113,1298 P1.2 ; 960,1435 975,1450 1040,1450 ; D3.2@1040,1399.06 1040,1450 ; D4.2 1040,1450 ; S1.12 S1.11 S1.10 S1.9 S1.8 S1.7 ; v1(1336,1980) 1363,1980 1382,1961 1382,1809.57 v1(1388.28,1803.28) ; U6.1@2435.2,1466 2441.54,1459.66 C17.1 2441.54,1299.54
  Bottom Layer w40: U9.2 832.03,1222.03 832.03,1255.03 872,1295
  Bottom Layer w50: v1(625,1607) 625,1475 625,1472 589,1436 589,1186 639,1136 798,1136 830,1168 U9.2 ; v1(830,2510) 890,2450 v1(1335,2450) v1@1335,1980 ; 875,1298 960,1298 960,1435 960,1947 993,1980 v1@1335,1980 ; v1(1336,1980) v1@1335,1980 ; P4.2@2192.2,1162.2 2304.2,1162.2 2441.54,1299.54 2538.54,1299.54 2594,1355 2594,1743
HTRC_SCK: Q2.3 R6.1 U1.8 | length 410.2
  Top Layer w10: U1.8 1340,2130 1363.46,2106.54 R6.1
  Top Layer w20: R6.1 1366.06,2077.4 Q2.3@1437.32,2077.4
HTRC_SDI: Q4.3 R12.1 U1.9 | length 418.9
  Top Layer w10: U1.9 1150,2180 1170,2160 1340,2160 1363.46,2183.46 R12.1
  Top Layer w20: R12.1 1367.17,2213.7 Q4.3@1437.32,2213.7
HTRC_SDO: Q5.3 R17.1 U1.10 | length 449.8
  Top Layer w10: U1.10 1170,2230 1210,2270 1330,2270 1363.46,2303.46 R17.1
  Top Layer w20: R17.1 Q5.3@1437.32,2350
I2C_SCL: R19.1 U3.19 U4.6 | length 1303.2
  Top Layer w10: R19.1 460,1683.46 460,1580 485,1555 U4.6 629,1555 734,1660 734,1732 799,1797 967,1797 1046,1718 1046,1601 1092,1555 1283.39,1555 U3.19
I2C_SDA: R20.1 U3.20 U4.5 | length 1466.5
  Top Layer w10: R20.1 470,1780 440,1750 440,1540 475,1505 U4.5 607.28,1505 754,1651.72 754,1723.72 807.28,1777 958.72,1777 1026,1709.72 1026,1592.72 1092.97,1525.75 U3.20
LED_GREEN: R31.1 U3.18 | length 110.9
  Top Layer w10: R31.1 1192.8,1588.74 U3.18
LED_RED: R28.1 U3.6 | length 133.7
  Top Layer w10: U3.6 1672.24,1557.24 1700,1585 R28.1
LOCK: D1.1 P3.1 U5.4 | length 904.2
  Top Layer w50: U5.4 1989.76,1257.56 2192.2,1460 2285,1460 2363.58,1538.58 D1.1
NetC3_1: C3.1 C4.2 C7.1 C7.2 R4.2 R7.1 | length 356642.3
  Top Layer w10: v1(65,2880) 40,2855 40,125 130,35 2830,35 2925,130 2925,2810 2815,2920 160,2920 55,2815 55,135 140,50 2820,50 2910,140 2910,2800 2805,2905 170,2905 70,2805 70,145 150,65 2810,65 2895,150 2895,2790 2795,2890 180,2890 85,2795 85,155 160,80 2800,80 2880,160 2880,2780 2785,2875 190,2875 100,2785 100,165 170,95 2790,95 2865,170 2865,2770 2775,2860 200,2860 115,2775 115,175 180,110 2780,110 2850,180 2850,2760 2765,2845 210,2845 130,2765 130,185 190,125 2770,125 2835,190 2835,2750 2755,2830 220,2830 145,2755 145,195 200,140 2760,140 2820,200 2820,2740 2745,2815 230,2815 160,2745 160,205 210,155 2750,155 2805,210 2805,2730 2735,2800 240,2800 175,2735 175,215 220,170 2740,170 2790,220 2790,2720 2725,2785 250,2785 190,2725 190,225 230,185 2730,185 2775,230 2775,2710 2715,2770 260,2770 205,2715 205,235 240,200 2720,200 2760,240 2760,2700 2705,2755 270,2755 220,2705 220,245 250,215 2710,215 2745,250 2745,2690 2695,2740 280,2740 235,2695 235,255 260,230 2700,230 2730,260 2730,2680 2685,2725 290,2725 250,2685 250,265 270,245 2690,245 2715,270 2715,2670 2675,2710 300,2710 265,2675 265,275 280,260 2675,260 2700,285 2700,2660 2665,2695 310,2695 280,2665 280,285 290,275 2665,275 2685,295 2685,2650 2655,2680 328.5,2680 324.55,2676.05 324.55,2670.45 485,2510 C3.1 ; v1(454,2284) 454,2283 453.6,2282.6 C7.1 650,2282.6 R7.1 ; C7.2 590,2357.4 612.6,2380 650,2380 650,2430 640,2440 C3.1 ; R4.2 1065,2615 1049,2631 663,2631 640,2608 C3.1
  Bottom Layer w10: v1(65,2880) 105,2920 2815,2920 2925,2810 2925,130 2830,35 130,35 40,125 40,2800 145,2905 2805,2905 2910,2800 2910,140 2820,50 140,50 55,135 55,2790 155,2890 2795,2890 2895,2790 2895,150 2810,65 150,65 70,145 70,2780 165,2875 2785,2875 2880,2780 2880,160 2800,80 160,80 85,155 85,2770 175,2860 2775,2860 2865,2770 2865,170 2790,95 170,95 100,165 100,2760 185,2845 2765,2845 2850,2760 2850,180 2780,110 180,110 115,175 115,2750 195,2830 2755,2830 2835,2750 2835,190 2770,125 190,125 130,185 130,2740 205,2815 2745,2815 2820,2740 2820,200 2760,140 200,140 145,195 145,2730 215,2800 2735,2800 2805,2730 2805,210 2750,155 210,155 160,205 160,2720 225,2785 2725,2785 2790,2720 2790,220 2740,170 220,170 175,215 175,2710 235,2770 2715,2770 2775,2710 2775,230 2730,185 230,185 190,225 190,2700 245,2755 2705,2755 2760,2700 2760,240 2720,200 240,200 205,235 205,2690 255,2740 2695,2740 2745,2690 2745,250 2710,215 250,215 220,245 220,2680 265,2725 2685,2725 2730,2680 2730,260 2700,230 260,230 235,255 235,2670 275,2710 2675,2710 2715,2670 2715,270 2690,245 269.95,245 250,264.95 250,2660 285,2695 2665,2695 2700,2660 2700,285 2675,260 280,260 265,275 265,2650 295,2680 2655,2680 2685,2650 2685,295 2665,275 290,275 280,285 280,2628.5 283.95,2632.45 289.55,2632.45 454,2468 v1(454,2284)
NetC3_2: C3.2 C4.1 U1.2 | length 283.3
  Top Layer w10: C3.2 740,2440 727.4,2427.4 C4.1 U1.2
NetC5_2: C5.2 U1.13 | length 209
  Top Layer w20: U1.13 1115,2380 1150,2415 1150,2450 1180,2480 C5.2
NetC6_2: C6.2 U1.12 | length 186.4
  Top Layer w20: U1.12 1125,2330 1211.54,2416.54 C6.2
NetC8_2: C8.2 U1.6 Y1.2 | length 482.6
  Top Layer w10: C8.2 Y1.2 722.68,2112.68 790,2180 U1.6
NetC9_2: C9.2 R13.1 U1.7 Y1.1 | length 468.2
  Top Layer w10: U1.7 Y1.1@1025.51,1980 ; Y1.1 C9.2 R13.1@1216.54,1915
  Top Layer w20: Y1.1@1025.51,1980 Y1.1
NetC18_2: C18.2 L1.2 U3.5 | length 182.5
  Top Layer w10: U3.5 1735.79,1525.75 C18.2 L1.2
NetD2_2: D2.2 LS1.2 PS1.1 Q6.3 R22.2 | length 370.3
  Bottom Layer w20: R22.2 777.2,1541.54 D2.2 790,1443.66 Q6.3 836.85,1420 870,1453.15 LS1.2@870,1394.1
NetD3_1: D3.1 R28.2 | length 1079.6
  Top Layer w10: v1(1803,1691) 1803.46,1690.54 R28.2
  Bottom Layer w10: D3.1@1040,1340 1080,1340 1125,1385 1125,1496 1320,1691 v1(1803,1691)
NetD4_1: D4.1 R31.2 | length 204.7
  Top Layer w10: v1(1125,1670) 1126.54,1668.46 R31.2
  Bottom Layer w10: D4.1 1040,1625 1085,1670 v1(1125,1670)
NetQ1_3: Q1.3 R1.1 R2.1 R3.2 | length 276.8
  Bottom Layer w20: R3.2 R1.1 2457.4,1870 R2.1 2568.66,1950 Q1.3
NetQ3_3: Q3.3 R8.1 R9.1 R10.2 | length 285.1
  Bottom Layer w10: R8.1@2457.4,2130 R8.1
  Bottom Layer w20: R10.2 R8.1 ; R8.1@2457.4,2130 R9.1 2502,2050 2523.34,2028.66 Q3.3
NetR4_1: R4.1 U1.14 | length 72.8
  Top Layer w10: U1.14 1064.49,2502.09 R4.1
NetR7_2: R7.2 U1.4 | length 148.1
  Top Layer w10: R7.2 U1.4
NetR18_2: R18.2 U3.4 U6.2 | length 1073.3
  Top Layer w10: U3.4 1683.75,1494.25 v1(1685,1493)
  Bottom Layer w10: v1(1685,1493) 2017,1493 2131,1379 2262,1379 2312,1429 2312,1531 2333.4,1552.4 2435.2,1552.4 2436.54,1553.74 R18.2
NetR24_2: R24.2 R29.2 U7.6 U8.1 | length 549.5
  Top Layer w10: R29.2 2071.54,2481.54 2030,2440 2030,2350 2055,2325 U7.6 2334.84,2325 U8.1 2340,2319.84 R24.2@2340,2250
NetR25_2: R25.2 R30.2 U7.7 U8.2 | length 401.4
  Top Layer w10: U7.7 2190,2375 2210,2395 2340,2395 ; U8.2 2340,2380.16 2340,2395 ; R30.2 2348.94,2448.46 R25.2 2347.4,2402.4 2340,2395
NetR26_1: R26.1 U7.1 | length 72.4
  Top Layer w10: U7.1 1933.46,2442.95 R26.1
NetS1_1: S1.1 U3.14 | length 1070
  Top Layer w10: S1.1 1160,790 1160,1100 1265,1205 v1(1265,1230) ; U3.14 1402.76,1579.24 v1(1403,1579)
  Bottom Layer w10: v1(1265,1230) 1296,1261 1296,1469 1403,1576 v1(1403,1579)
NetS1_2: S1.2 U3.15 | length 1060.5
  Top Layer w10: v1(1265,1272.43) 1292.57,1272.43 1310,1255 1310,1120 1270,1080 1270,780 S1.2 ; v1(1371,1608) 1371.26,1608.26 U3.15
  Bottom Layer w10: v1(1265,1272.43) 1265,1502 v1(1371,1608)
NetS1_3: S1.3 U3.26 | length 634.4
  Top Layer w10: U3.26 1370.47,1344.84 1370.47,789.53 1415,745 S1.3@1415,730
NetS1_4: S1.4 U3.27 | length 665.7
  Top Layer w10: U3.27 1402.76,1147.24 1465,1085 1465,790 1517.5,737.5 S1.4@1517.5,727.5
NetS1_5: S1.5 U3.28 | length 694
  Top Layer w10: U3.28 1434.25,1190.75 1565,1060 1565,790 1617.5,737.5 S1.5@1617.5,727.5
NetS1_6: S1.6 U3.29 | length 774.5
  Top Layer w10: U3.29 1465.75,1199.25 1550,1115 1645,1115 1665,1095 1665,790 1715,740 S1.6@1715,730
OSC_IN: R13.2 U3.2 | length 1978.3
  Top Layer w10: v1(1091,1420) v1(1156,1420) ; R13.2 v1(1336,1922) ; U3.2 v1(1685,1431.26)
  Bottom Layer w10: v1(1091,1420) 1091,1546 1199,1654 1199,1734 1236,1771 1283,1771 1336,1824 v1(1336,1922) ; v1(1156,1420) 1211,1420 1233,1398 1233,1208 1247,1194 1384,1194 1480.76,1290.76 1511.24,1290.76 1543,1259 1775,1259 1794,1278 1794,1419 1781.74,1431.26 v1(1685,1431.26)
RS485_A: P2.1 R24.1 | length 463.4
  Top Layer w10: P2.1 2025,2005 2025,2080 2060,2115 2100,2115 2235,2250 R24.1@2265.2,2250
RS485_B: P2.2 R25.1 | length 967.8
  Top Layer w10: P2.2 2220,2190 2387,2190 2475,2278 2475,2495 2460,2510 2285,2510 2272.6,2497.6 R25.1
SPI_MISO: Q5.2 R16.1 U3.12 | length 1111.6
  Top Layer w10: U3.12 1465.75,1820.75 1525,1880 1648.28,1880 1751,1982.72 1751,2339 1702.6,2387.4 1586.06,2387.4 Q5.2@1520,2387.4
  Top Layer w20: R16.1@1586.06,2387.4 R16.1
SPI_MOSI: Q4.2 R11.1 U3.13 | length 965.4
  Top Layer w10: U3.13 1434.25,1821.25 1513,1900 1640,1900 1730,1990 1730,2220 1706.54,2243.46 R11.1 ; Q4.2@1520,2251.1 R11.1@1582.36,2251.1
  Top Layer w20: R11.1@1582.36,2251.1 R11.1
SPI_SCK: Q2.2 R5.1 U3.11 | length 654.4
  Top Layer w10: U3.11 1497.24,1801.24 v1(1498,1802) ; Q2.2@1520,2114.8 R5.1@1582.13,2114.8 ; R5.1@1590,2106.93 1593.07,2110 v1(1640,2110)
  Top Layer w20: R5.1@1582.13,2114.8 R5.1@1590,2106.93
  Bottom Layer w10: v1(1498,1802) 1498,2028 1580,2110 v1(1640,2110)
SWCLK: P1.1 U3.24 | length 171.4
  Top Layer w10: P1.1 1285.63,1370.63 U3.24
SWDIO: P1.3 U3.23 | length 116.7
  Top Layer w10: P1.3 1223.74,1431.26 U3.23
TEST: C10.1 R14.1 R15.2 U1.5 | length 474.7
  Top Layer w10: R14.1 R15.2 730,2190 770,2230 U1.5
USART_DE: R23.1 U3.7 U7.2 U7.3 | length 1271.4
  Top Layer w10: U3.7 1658.74,1588.74 1690,1620 1690,1816.72 1850,1976.72 1850,2180 1895,2225 1975,2225 2000,2250 2000,2375 ; U7.3 U7.2 2000,2375 ; R23.1@2000,2493.07 2000,2375
USART_RX: R26.2 R27.2 U3.9 | length 1021
  Top Layer w10: U3.9 1560.24,1745.24 1810,1995 1810,2465 1835,2490 R26.2 R27.2
USART_TX: U3.8 U7.4 | length 806.2
  Top Layer w10: U3.8 1614.37,1769.37 1830,1985 1830,2235 1870,2275 U7.4
WD0: P2.5 R2.2 U2.3 | length 315.4
  Top Layer w10: P2.5 2330,1950 2379,1999 2445,1999 2449.68,1994.32 U2.3
  Bottom Layer w20: P2.5 R2.2
WD1: P2.6 R9.2 U2.5 | length 242.6
  Top Layer w10: P2.6 2372,2050 2395.43,2026.57 U2.5
  Bottom Layer w20: P2.6 R9.2
WGNDR0: R3.1 U3.25 | length 1434.2
  Top Layer w10: U3.25 1339.76,1386.76 1509,1556 v1(1509,1609)
  Bottom Layer w10: v1(1509,1609) 1521,1621 2046,1621 2137,1530 2251,1530 2380,1659 R3.1
WGNDR1: R10.1 U3.3 | length 1937.8
  Top Layer w10: v1(1537,1461) 1612.61,1461 U3.3 ; v1(1816,1228) 2003,1415 2003,2090 v1(2120,2207)
  Bottom Layer w10: v1(1537,1461) 1539,1463 1543,1459 1545.26,1461.26 1780.02,1461.26 1816,1425.28 v1(1816,1228) ; v1(2120,2207) 2379.6,2207 R10.1
WGNDT0: Q1.1 U3.21 | length 1725.7
  Top Layer w10: U3.21 1369.25,1494.25 1438,1563 v1(1438,1608) v1@1438,1612 ; v1(2093,1870) 2600,1870 2610,1860 v1@2610,1808
  Bottom Layer w10: v1(1438,1608) 1438,1632 1467,1661 2027,1661 2040.75,1674.75 2040.75,1817.75 v1(2093,1870) ; Q1.1 2609,1867.06 v1(2609,1808)
WGNDT1: Q3.1 U3.22 | length 1979.5
  Top Layer w10: U3.22 1386.76,1462.76 1473,1549 v1(1473,1580) ; v1(2093,1822) 2062,1822 2053,1831 2053,1888 2065,1900 2512,1900 2533,1921 v1(2533,2175)
  Bottom Layer w10: v1(1473,1580) 1473,1615.43 1498.57,1641 2035.28,1641 2060.75,1666.47 2060.75,1789.75 v1(2093,1822) ; Q3.1 2533,2111.74 v1(2533,2175)
pads on no net: U1.11 U2.2

## Keep-outs
Keep-Out Layer:
  the board outline again, w10

## Other copper
Top Layer:
  rectangle net GND: 570,375 1090,1160
Bottom Layer:
  rectangle net 3V3: 620,520 1100,1063

## Silkscreen, mask and mechanical layers (free items; w line width, h text height)
Top Overlay:
  rectangle: 2440,2536 2634,2633
  rectangle: 1784,2113 1851,2135
  rectangle: 1783,2076 1851,2098
  rectangle: 1865,2076 1884,2098
  rectangle: 1865,2113 1884,2135
  region: 1800,1971 1781,1971 1781,1949 1800,1949
  region: 1800,2008 1781,2008 1781,1986 1800,1986
  region: 1882,2008 1814,2008 1814,1986 1882,1986
  region: 1881,1971 1814,1971 1814,1949 1881,1949
  lines w10: 1995,2008 2008,2021 2008,2022 ; 1995,2035 2008,2022 ; 1776,2022 1761,2037 1761,2135 1776,2150 1941,2150 1960,2131 1960,2047 1935,2022 ; 1776,2022 1760,2006 1760,1906 1773.75,1892.25 1946.25,1892.25 1961,1907 1961,1996 1950,2007 1935,2022 ; 1776,2022 1935,2022 ; 1935,2022 2008,2022
  text "DE-150824" at 1181,2790 h60
  text "AUG. 2024." at 1181,2684 h60
  text "RS485" at 1783,2038 h25
  text "WIEGAND" at 1781,1911 h25
  text "A0" at 1937,1709 h60
  text "B1" at 1937,1566 h60
  text "DL" at 1937,1423 h60
  text "+12V" at 1827.04,1280 h60
  text "www.imedia.ba" at 1072,1149 h60
  text "GND" at 1877.02,1137 h60
  text "A0 A1 A2 A3 A4 A5" at 1201,1086 h33
  text "ADDRESSE" at 1234,847 h60
  text "iMEDIA Sarajevo" at 1130,541 h60
  text "Bosna i Hercegovina" at 1130,434 h60
Bottom Overlay:
  circle w39.37: c1456.69,1460 r275.59
  rectangle: 2439,2536 2633,2633
  lines w10: 964.57,1263.15 1122.05,1263.15 1122.05,1656.85 964.57,1656.85 ; 964.57,1066.3 964.57,1853.7 1830.71,1853.7 1830.71,1066.3 964.57,1066.3
Top Paste:
  rectangle: 634,417 1024,1009
Top Solder:
  rectangle: 627,411 1032,1016
Mechanical 1: